# EAGLE board PCB_brd_iter2 (EAGLE 9.6.2)
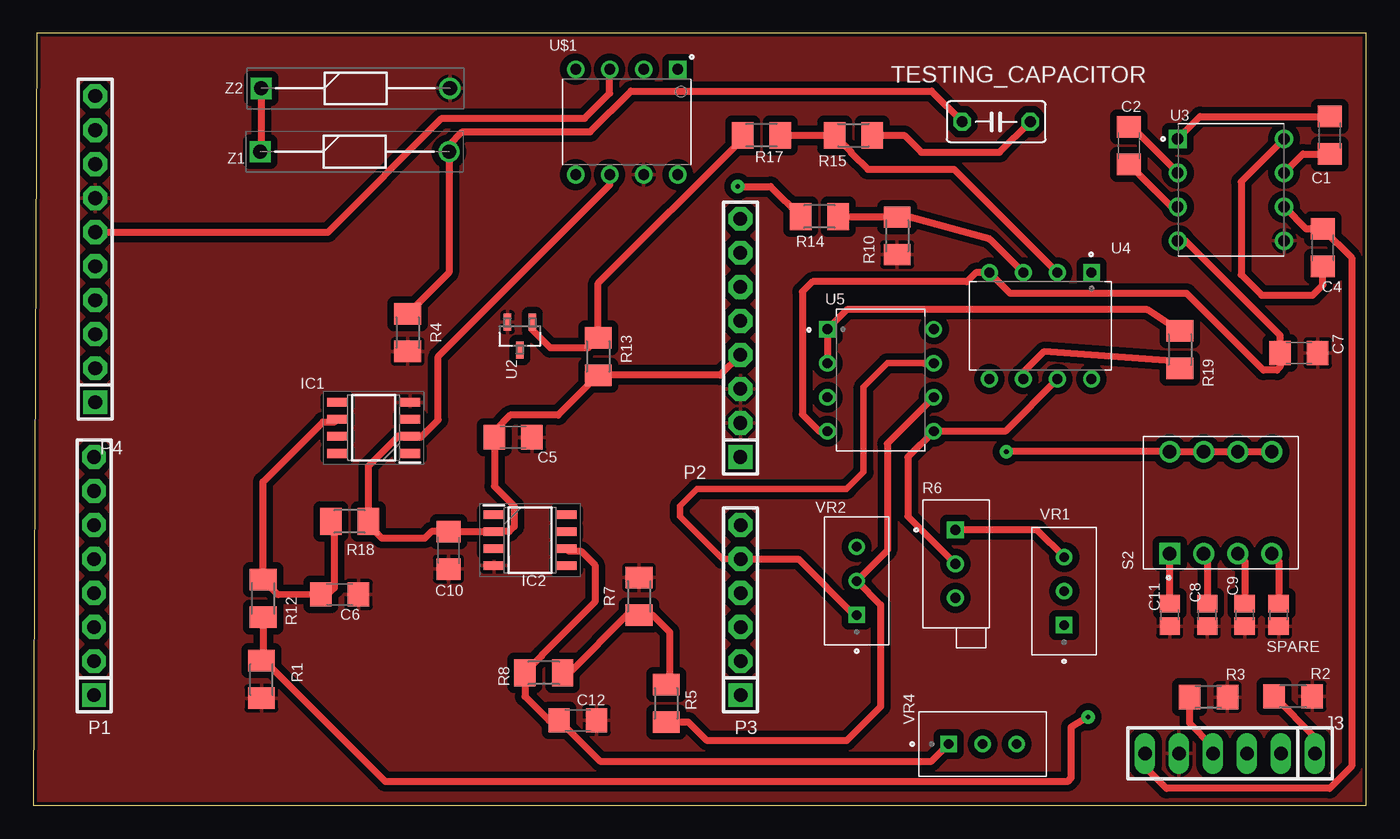
[diagram p0: board, top side]
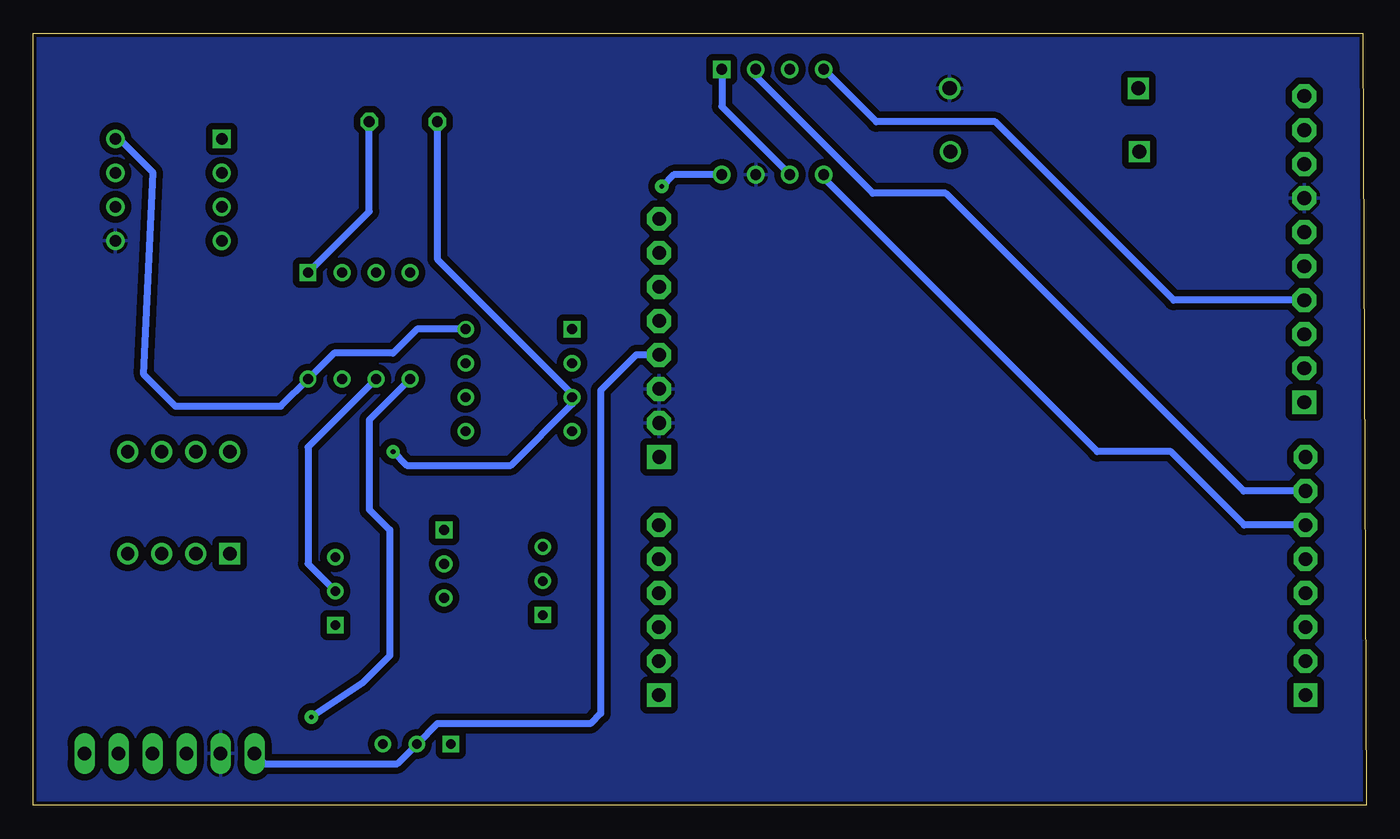
[diagram p1: board, bottom side, seen from below]

Size 99.49 x 57.65 mm. Coordinates in mm from the lower left corner, seen from the top.
Outline: 0,0 99.49,0 99.49,57.65 0.25,57.65 0,0
Copper layers (1*16): Top 0.035mm / dielectric 1.5mm / Bottom 0.035mm
Design rules "default *": minimum track width 0.5mm, minimum drill 0.35mm, track to track 0.5mm, track to pad 0.5mm, pad to pad 0.5mm, via to via 0.5mm, smd to smd 0.5mm, copper to edge 10mil, drill to drill 6mil, minimum pad ring 10mil, minimum via ring 8mil, stop-mask expansion 4mil, vias tented up to drill 0mil, thermal gap 10mil

## Footprints (pad centres in the part's own frame; a part is rotated, then mirrored left to right if it is on the bottom)
C1206 = smd 1.6 x 1.8: 1 -1.4,0; 2 1.4,0
C0805 = smd 1.3 x 1.5: 1 -0.85,0; 2 0.85,0
SOIC127P600X175-8N = smd 1.528 x 0.65: 1 -2.711,1.905; 2 -2.711,0.635; 3 -2.711,-0.635; 4 -2.711,-1.905; 5 2.711,-1.905; 6 2.711,-0.635; 7 2.711,0.635; 8 2.711,1.905
SIP-100-06-40Y = drill 1.016 long: 1 -6.35,0; 2 -3.81,0; 3 -1.27,0; 4 1.27,0; 5 3.81,0; 6 6.35,0
SIP-100-08-40 = drill 1.016 pad 1.778 square: 1 -8.89,0 | drill 1.016 pad 1.778 octagon: 2 -6.35,0; 3 -3.81,0; 4 -1.27,0; 5 1.27,0; 6 3.81,0; 7 6.35,0; 8 8.89,0
SIP-100-06-40 = drill 1.016 pad 1.778 square: 1 -6.35,0 | drill 1.016 pad 1.778 octagon: 2 -3.81,0; 3 -1.27,0; 4 1.27,0; 5 3.81,0; 6 6.35,0
SIP-100-10-40 = drill 1.016 pad 1.778 square: 1 -11.43,0 | drill 1.016 pad 1.778 octagon: 2 -8.89,0; 3 -6.35,0; 4 -3.81,0; 5 -1.27,0; 6 1.27,0; 7 3.81,0; 8 6.35,0; 9 8.89,0; 10 11.43,0
M1206 = smd 1.6 x 2: 1 -1.4,0; 2 1.4,0
R1206 = smd 1.6 x 1.803: 1 -1.422,0; 2 1.422,0
TRIM_3296X-1-203LF = drill 0.74 pad 1.14 square: 1 0,2.54 | drill 0.74 pad 1.14: 2 0,0; 3 0,-2.54
SW_DS01C-254-S-04BE = drill 1 pad 1.58 square: 1A -3.81,-3.81 | drill 1 pad 1.58: 1B -3.81,3.81; 2A -1.27,-3.81; 2B -1.27,3.81; 3A 1.27,-3.81; 3B 1.27,3.81; 4A 3.81,-3.81; 4B 3.81,3.81
C050-030X075 = drill 0.813 octagon: 1 -2.54,0; 2 2.54,0
SOT96P237X112-3N = smd 0.559 x 1.27: 1 -0.94,-1.041; 2 0.94,-1.041; 3 0,1.041
DIP794W47P254L991H457Q8 = drill 0.86 pad 1.21 square: 1 -3.97,3.81 | drill 0.86 pad 1.21: 2 -3.97,1.27; 3 -3.97,-1.27; 4 -3.97,-3.81; 5 3.97,-3.81; 6 3.97,-1.27; 7 3.97,1.27; 8 3.97,3.81
DIP794W45P254L1060H508Q8 = drill 0.74 square: 1 -3.97,3.81 | drill 0.74: 2 -3.97,1.27; 3 -3.97,-1.27; 4 -3.97,-3.81; 5 3.97,-3.81; 6 3.97,-1.27; 7 3.97,1.27; 8 3.97,3.81
DIP787W46P254L927H533Q8 = drill 0.8 square: 1 -3.935,3.81 | drill 0.8: 2 -3.935,1.27; 3 -3.935,-1.27; 4 -3.935,-3.81; 5 3.935,-3.81; 6 3.935,-1.27; 7 3.935,1.27; 8 3.935,3.81
TRIM_3296W-1-103RLF = drill 0.71 square: 1 -2.54,0 | drill 0.71: 2 0,0; 3 2.54,0
DIOAD1413W86L463D238 = drill 1.05 pad 1.575 square: 1 0,0 | drill 1.05 pad 1.575: 2 14.1,0

## Placement (x,y rotation side)
C1  22uF  [C1206]  96.77,50.04 90 top
C2  22uF  [C1206]  81.79,49.28 270 top
C4  22uF  [C1206]  96.27,41.66 90 top
C5  1uF  [C1206]  35.81,27.49 0 top
C6  22uF  [C1206]  22.86,15.75 0 top
C7  22uF  [C1206]  94.49,33.78 180 top
C8  36pF  [C0805]  87.63,14.22 270 top
C9  62pF  [C0805]  90.42,14.22 270 top
C10  1uF  [C1206]  30.99,19.05 270 top
C11  11pF  [C0805]  84.84,14.22 270 top
C12  22uF  [C1206]  40.64,6.35 0 top
IC1  REF5025AID  [SOIC127P600X175-8N]  25.4,28.19 180 top
IC2  REF5025AID  [SOIC127P600X175-8N]  37.08,19.81 0 top
J3  USB_C  [SIP-100-06-40Y]  89.33,3.89 180 top
P1  M-1X08-SIP-100-40  [SIP-100-08-40]  4.52,17.13 90 top
P2  M-1X08-SIP-100-40  [SIP-100-08-40]  52.78,34.91 90 top
P3  M-1X06-SIP-100-40  [SIP-100-06-40]  52.79,14.59 90 top
P4  M-1X10-SIP-100-40  [SIP-100-10-40]  4.61,41.54 90 top
R1  5k  [M1206]  17.02,9.4 270 top
R2  5.1k  [R1206]  94.05,8.14 0 top
R3  5.1k  [R1206]  87.73,8.09 0 top
R4  1M  [M1206]  27.94,35.31 90 top
R5  4k  [M1206]  47.24,7.62 90 top
R6  20K_POT  [TRIM_3296X-1-203LF]  68.83,18.03 0 top
R7  1k  [M1206]  45.21,15.62 90 top
R8  1k  [M1206]  38.1,9.91 0 top
R10  100k  [M1206]  64.49,42.53 90 top
R12  10k  [M1206]  17.14,15.47 90 top
R13  4.7k  [M1206]  42.16,33.53 90 top
R14  120k  [M1206]  58.69,43.98 0 top
R15  27k  [M1206]  61.21,50.04 180 top
R17  3.5k  [M1206]  54.36,50.04 0 top
R18  4.7k  [M1206]  23.6,21.21 0 top
R19  20k  [M1206]  85.6,34.04 90 top
S2  SLIDING_SWITCH  [SW_DS01C-254-S-04BE]  88.65,22.61 0 top
SPARE  [C0805]  92.96,14.22 270 top
TESTING_CAPACITOR  [C050-030X075]  71.88,51.05 180 top
U2  AD1580  [SOT96P237X112-3N]  36.32,35.05 180 top
U3  MAX680CPA+  [DIP794W47P254L991H457Q8]  89.41,45.97 0 top
U4  TL072  [DIP794W45P254L1060H508Q8]  75.18,35.81 270 top
U5  TL072  [DIP794W45P254L1060H508Q8]  63.25,31.75 0 top
U$1  MCP4921-E/P  [DIP787W46P254L927H533Q8]  44.29,51.04 270 top
VR1  10K_POT  [TRIM_3296W-1-103RLF]  76.96,16 90 top
VR2  10K_POT  [TRIM_3296W-1-103RLF]  61.47,16.76 90 top
VR4  10K_POT  [TRIM_3296W-1-103RLF]  70.87,4.57 0 top
Z1  1N4736A  [DIOAD1413W86L463D238]  16.92,48.82 0 top
Z2  1N4736A  [DIOAD1413W86L463D238]  16.99,53.55 0 top

## Library data of the parts
C1 C2 C4-C10 C12 R1-R5 R7 R8 R10 R12-R15 R17-R19 SPARE TESTING_CAPACITOR = adafruit
C11 = adafruit; SPICEPREFIX: C
IC1 IC2 = REF5025AID; DESCRIPTION: 3 Vpp/V Noise, 3 ppm/C Drift Precision Series Voltage Reference; HEIGHT: 1.75mm; MANUFACTURER_NAME: Texas Instruments; MANUFACTURER_PART_NUMBER: REF5025AID; MOUSER_PART_NUMBER: 595-REF5025AID; MOUSER_PRICE-STOCK: https://www.mouser.co.uk/ProductDetail/Texas-Instruments/REF5025AID?qs=xL7PkI2RoJ6OzMm6G7%2FePw%3D%3D
J3 P1-P4 = con-headers-jp
R6 = 3296X-1-203LF; AVAILABILITY: In Stock; CHECK_PRICES: https://www.snapeda.com/parts/3296X-1-203LF/Bourns/view-part/?ref=eda; DESCRIPTION: Trimmer, Cermet, Rest 20 Kilohms, PCB, 25 Turns, Pwr-Rtg 0.5W | Bourns 3296X-1-203LF; MF: Bourns; MP: 3296X-1-203LF; PACKAGE: SOD-123 Bourns; PRICE: None; PURCHASE-URL: https://www.snapeda.com/api/url_track_click_mouser/?unipart_id=270465&manufacturer=Bourns&part_name=3296X-1-203LF&search_term=None; SNAPEDA_LINK: https://www.snapeda.com/parts/3296X-1-203LF/Bourns/view-part/?ref=snap
S2 = DS01C-254-S-04BE; MANUFACTURER: CUI; MAXIMUM_PACKAGE_HEIGHT: 7.0mm; PARTREV: 1.0; STANDARD: Manufacturer recommendations
U2 = AD1580BRTZ-R2-REEL7
U3 = MAX680CPA_; AVAILABILITY: In Stock; CHECK_PRICES: https://www.snapeda.com/parts/MAX680CPA+/Analog+Devices/view-part/?ref=eda; DESCRIPTION: Charge Pump Switching Regulator IC Positive and Negative (Dual Rail) Fixed ±2Vin 2 Output 10mA 8-DIP (0.300, 7.62mm); MF: Maxim Integrated Products; MP: MAX680CPA+; PACKAGE: None; PRICE: None; SNAPEDA_LINK: https://www.snapeda.com/parts/MAX680CPA+/Analog+Devices/view-part/?ref=snap
U4 U5 = TL072; AVAILABILITY: In Stock; CHECK_PRICES: https://www.snapeda.com/parts/TL072/Texas+Instruments/view-part/?ref=eda; DESCRIPTION: Operational Amplifiers - Op Amps Dual Lo-Noise JFET Input Op Amp; MF: Texas Instruments; MP: TL072; PACKAGE: None; PRICE: None; SNAPEDA_LINK: https://www.snapeda.com/parts/TL072/Texas+Instruments/view-part/?ref=snap
U$1 = MCP4921-E_P; CHECK_PRICES: https://www.snapeda.com/parts/MCP4921-E/P/Microchip/view-part/?ref=eda; DESCRIPTION: Microchip 12 bit Serial DAC 8-Pin PDIP | Microchip Technology Inc. MCP4921-E/P; MF: Microchip; MP: MCP4921-E/P; PACKAGE: DIP-8 Microchip; PURCHASE-URL: https://www.snapeda.com/api/url_track_click_mouser/?unipart_id=60&manufacturer=Microchip&part_name=MCP4921-E/P&search_term=mcp4921; SNAPEDA_LINK: https://www.snapeda.com/parts/MCP4921-E/P/Microchip/view-part/?ref=snap
VR1 VR2 VR4 = 3296W-1-103RLF; AVAILABILITY: In Stock; CHECK_PRICES: https://www.snapeda.com/parts/3296W-1-103RLF/Bourns/view-part/?ref=eda; DESCRIPTION: Trimmer, Cermet, Rest 10 Kilohms, PCB, 25 Turns, Pwr-Rtg 0.5W | Bourns 3296W-1-103RLF; MF: Bourns; MP: 3296W-1-103RLF; PACKAGE: NON STANDARD-3 Bourns; PRICE: None; PURCHASE-URL: https://www.snapeda.com/api/url_track_click_mouser/?unipart_id=480309&manufacturer=Bourns&part_name=3296W-1-103RLF&search_term=None; SNAPEDA_LINK: https://www.snapeda.com/parts/3296W-1-103RLF/Bourns/view-part/?ref=snap
Z1 Z2 = 1N4736A; DESCRIPTION: 1N4736 - Zener Diode, 6.8V, 5%, 1W; HEIGHT: mm; MANUFACTURER_NAME: onsemi; MANUFACTURER_PART_NUMBER: 1N4736A; MOUSER_PART_NUMBER: 512-1N4736A; MOUSER_PRICE-STOCK: https://www.mouser.co.uk/ProductDetail/onsemi-Fairchild/1N4736A?qs=SSucg2PyLi6CNqBOqJ%2FVZw%3D%3D

## Nets
+3.3V: P2.5
+5V: C4.2 C5.1 C10.1 IC1.2 IC2.2 J3.6 P2.4 R13.1 R18.2 U3.6 U$1.1 U$1.6 VR4.2
+12V: C4.1 U3.8 U4.8 U5.8
-12V: C7.2 U3.4 U4.4 U5.4
A0: P3.6
A2: P3.4
A3: P3.3
A4: P3.2
A5: P3.1
ADC_I/P: P3.5 U5.7 VR2.1
AVDD: P4.8
CC1: J3.4 R3.1
CC2: J3.1 R2.1
CS: P4.3
D2: P1.3
D4: P1.5
D7: P1.8
D8: P4.1
D+: J3.2
D-: J3.3
DAC_O/P: R14.1 U$1.8
GND: C5.2 C6.2 C7.1 C8.2 C9.2 C10.2 C11.2 C12.2 IC1.4 IC2.4 J3.5 P2.2 P2.3 P4.7 R1.2 R2.2 R3.2 R4.1 R7.2 R10.1 SPARE.2 U2.2 U3.5 U$1.7 Z2.2
IOREF: P2.7
MISO: P4.5
MOSI: P4.4 U$1.4
N$1: R6.1 VR1.3
N$2: R5.2 R7.1 R8.2
N$3: C12.1 IC2.6 R8.1 VR4.1
N$5: C1.2 U3.1
N$6: R13.2 R17.1 U2.1
N$7: C6.1 IC1.6 R12.2 R18.1
N$8: Z1.1 Z2.1
N$9: C1.1 U3.7
N$10: C2.2 U3.3
N$11: C2.1 U3.2
N$12: C9.1 S2.3A
N$13: S2.4A SPARE.1
N$14: C11.1 S2.1A
N$15: C8.1 S2.2A
N$33: P2.8
NRST: P2.6
OA1_IN+: R10.2 R14.2 U4.3
OA1_IN-: R15.2 R17.2 U4.2
OA1_O/P: R15.1 TESTING_CAPACITOR.1 U4.1
OA2_IN+: R1.1 R12.1 U4.5
OA2_IN-: R19.1 U4.6 VR1.2
OA3_IN+: R4.2 S2.1B S2.2B S2.3B S2.4B TESTING_CAPACITOR.2 U5.3 Z1.2
OA3_IN-: R19.2 U5.1 U5.2
OA4_IN+: R6.2 U4.7 U5.5
OA4_IN-: R5.1 U5.6 VR2.2
PWM: P4.2
PWM/D3: P1.4
PWM/D5: P1.6 U$1.5
PWM/D6: P1.7 U$1.2
RX/D0: P1.1
SCK: P4.6 U$1.3
SCL: P4.10
SDA: P4.9
TX/D1: P1.2
VIN: P2.1

## Tracks (layer width: path | path; a pad name or v marks a point on that pad's centre or on a via)
+5V
  Top 0.508: U3.6 95.03,43.06 C4.2 98.43,40.89 98.43,2.92 96.77,1.27 84.58,1.27 82.98,2.87 J3.6 | U$1.6 43.02,46.32 30.23,33.53 30.23,28.79 28.93,27.5 28.17,27.5 IC1.2 28.05,27.62 27.29,27.62 25,25.33 R18.2 25,20.96 26.01,19.94 29.21,19.94 29.72,20.45 C10.1 IC2.2 35.51,20.45 35.89,20.83 35.89,22.35 34.41,23.83 C5.1 34.41,27.97 35.59,29.15 39.18,29.15 R13.1 51.27,32.13 P2.4
  Bottom 0.508: U$1.1 48.1,52.19 U$1.6 | P2.4 54.5,33.64 57.15,30.99 57.15,6.86 57.91,6.1 69.34,6.1 VR4.2 72.31,3.12 82.22,3.12 J3.6
+12V
  Top 0.508: U3.8 90.17,46.58 90.17,39.62 91.69,38.1 95.5,38.1 96.27,38.86 C4.1
  Bottom 0.508: U3.8 93.1,49.78 90.56,47.24 91.26,32.17 88.9,29.81 81.03,29.81 U4.8 77.06,33.78 72.64,33.78 70.87,35.56 U5.8
-12V
  Top 0.508: U3.4 86.02,42.16 93.09,35.09 C7.2 93.09,32.77 92.83,32.51 91.82,32.51 86.11,38.23 72.93,38.23 U4.4 70.36,39.78 69.69,39.12 58.17,39.12 57.4,38.35 57.4,29.21 58.67,27.94 U5.4
ADC_I/P
  Top 0.5: P3.5 51.45,18.4 48.26,21.59 48.26,22.35 49.53,23.62 60.71,23.62 61.98,24.89 61.98,31.24 63.75,33.02 66.45,33.02
  Top 0.508: 66.45,33.02 U5.7 | P3.5 57.11,18.4 61.38,14.13 VR2.1
CC1
  Top 0.508: R3.1 86.31,6.15 88.06,4.39 J3.4
CC2
  Top 0.508: R2.1 95.68,5.09 J3.1
DAC_O/P  (via drill 0.35 pad 1)
  Top 0.508: v52.58,46.23 55.03,46.23 R14.1
  Bottom 0.508: U$1.8 51.7,47.1 v52.58,46.23
GND
  pour Top: 100.76,58.6 100.76,-1.46 -2.24,-1.46 -2.24,58.6
  pour Bottom: -3.81,60.2 -3.81,-2.79 -4.06,-3.05 101.35,-3.05 101.6,-2.79 101.6,60.45 -3.56,60.45
MOSI
  Bottom 0.508: P4.4 14.36,37.73 27.69,51.05 36.56,51.05 U$1.4
N$1
  Top 0.508: VR1.3 74.93,20.57 R6.1
N$2
  Top 0.508: R8.2 40.01,9.91 44.32,14.22 R7.1 46.23,14.22 47.5,12.95 47.5,9.27 R5.2
N$3
  Top 0.508: IC2.6 39.99,18.99 40.87,18.99 41.91,17.95 41.91,15.18 37.95,11.22 37.95,11.15 R8.1 36.7,8.13 38.48,6.35 C12.1 42.29,3.3 67.06,3.3 VR4.1
N$5
  Top 0.508: U3.1 87.09,51.44 C1.2
N$6
  Top 0.508: U2.1 37.26,35.51 38.6,34.17 41.4,34.17 R13.2 42.16,38.99 52.96,49.78 R17.1
N$7
  Top 0.508: IC1.6 22.5,28.64 21.61,28.64 17.14,24.17 R12.2 18.28,15.73 C6.1 21.97,15.75 22.45,16.23 22.45,20.96 R18.1
N$8
  Top 0.508: Z2.1 16.99,48.88 Z1.1
N$9
  Top 0.508: U3.7 94.77,48.64 C1.1
N$10
  Top 0.508: U3.3 84.96,44.7 C2.2
N$11
  Top 0.508: U3.2 82.01,50.68 C2.1
N$12
  Top 0.508: S2.3A 90.42,18.29 C9.1
N$13
  Top 0.508: S2.4A 92.96,18.29 SPARE.1
N$14
  Top 0.508: C11.1 S2.1A
N$15
  Top 0.508: S2.2A 87.63,18.54 C8.1
OA1_IN+
  Top 0.508: U4.3 71.41,42.29 65.41,43.93 R10.2 60.13,43.93 R14.2
OA1_IN-
  Top 0.508: R17.2 R15.2 61.06,48.79 61.06,48.73 62.29,47.5 68.74,47.5 U4.2
OA1_O/P
  Top 0.508: R15.1 65.02,50.04 66.29,48.77 72.14,48.77 TESTING_CAPACITOR.1
  Bottom 0.508: U4.1 74.42,44.36 TESTING_CAPACITOR.1
OA2_IN+  (via drill 0.35 pad 1)
  Top 0.508: R12.1 17.14,10.92 | 17.14,10.92 R1.1 | v78.74,6.6 77.47,5.84 77.47,2.03 77.22,1.78 26.29,1.78 17.14,10.92
  Bottom 0.508: U4.5 74.42,28.8 74.42,22.1 72.9,20.57 72.9,11.18 74.93,9.14 v78.74,6.6
OA2_IN-
  Top 0.508: U4.6 73.91,32.35 75.45,33.89 85.05,33.18 R19.1
  Bottom 0.508: U4.6 78.99,26.76 78.99,18.03 VR1.2
OA3_IN+  (via drill 0.35 pad 1)
  Top 0.508: S2.4B S2.3B S2.2B S2.1B v72.64,26.42 | R4.2 31.02,39.79 Z1.2 31.02,49.31 32.01,50.3 41.57,50.3 44.61,53.34 67.06,53.34 TESTING_CAPACITOR.2
  Bottom 0.508: v72.64,26.42 71.63,25.4 63.85,25.4 59.28,29.97 U5.3 59.28,30.73 69.34,40.8 TESTING_CAPACITOR.2
OA3_IN-
  Top 0.508: U5.2 U5.1 60.73,37.02 83.15,37.02 R19.2
OA4_IN+
  Top 0.508: R6.2 65.28,21.59 65.28,26 U5.5 72.55,27.94 U4.7
OA4_IN-
  Top 0.508: U5.6 63.75,27.02 63.75,19.05 VR2.2 63.25,14.99 63.25,7.37 60.71,4.83 50.29,4.83 48.9,6.22 R5.1
PWM/D5
  Bottom 0.508: P1.6 9.09,20.94 14.57,26.42 20.07,26.42 40.48,46.83 U$1.5
PWM/D6
  Bottom 0.508: P1.7 9.13,23.48 31.37,45.72 36.83,45.72 45.56,54.45 U$1.2
SCK
  Top 0.508: P4.6 21.98,42.81 30.48,51.31 41.15,51.31 43.02,53.18 U$1.3